# Altium PCB FocDriver.PcbDoc
Units mil, origin at the board's own origin, x right, y up, seen from the top; angles counter-clockwise.
Board outline 6000 x 4000 mil, 2 copper layers (Top Layer, Bottom Layer); 15 components, 14 nets, 92 pads, 0 vias.
Unrouted connection lines stored in the file: 32.
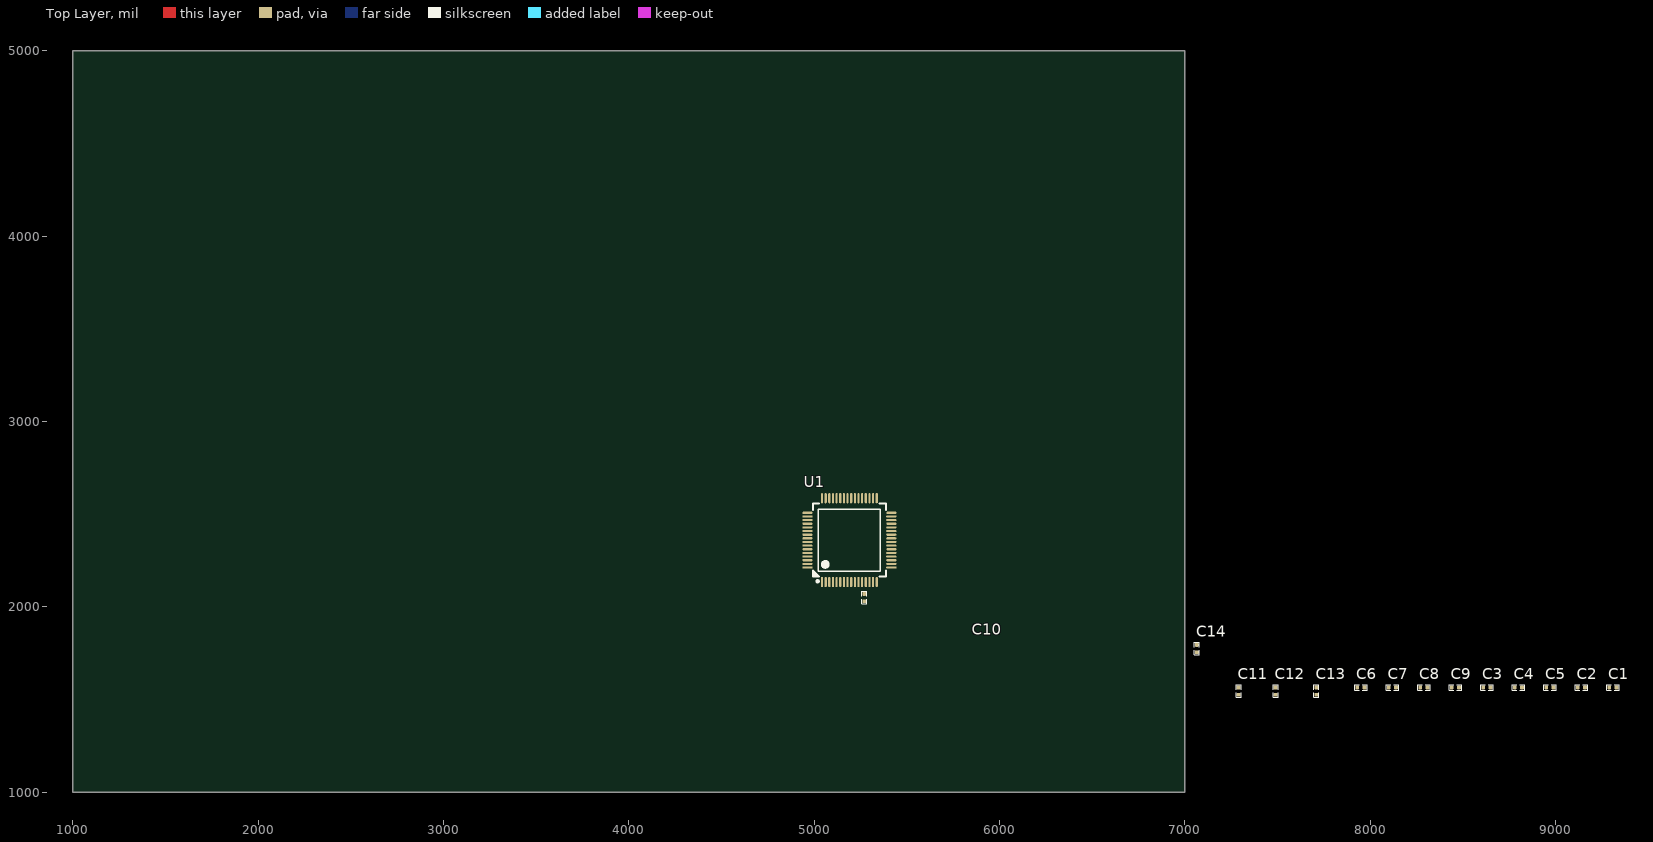
[diagram p0: Top Layer view]
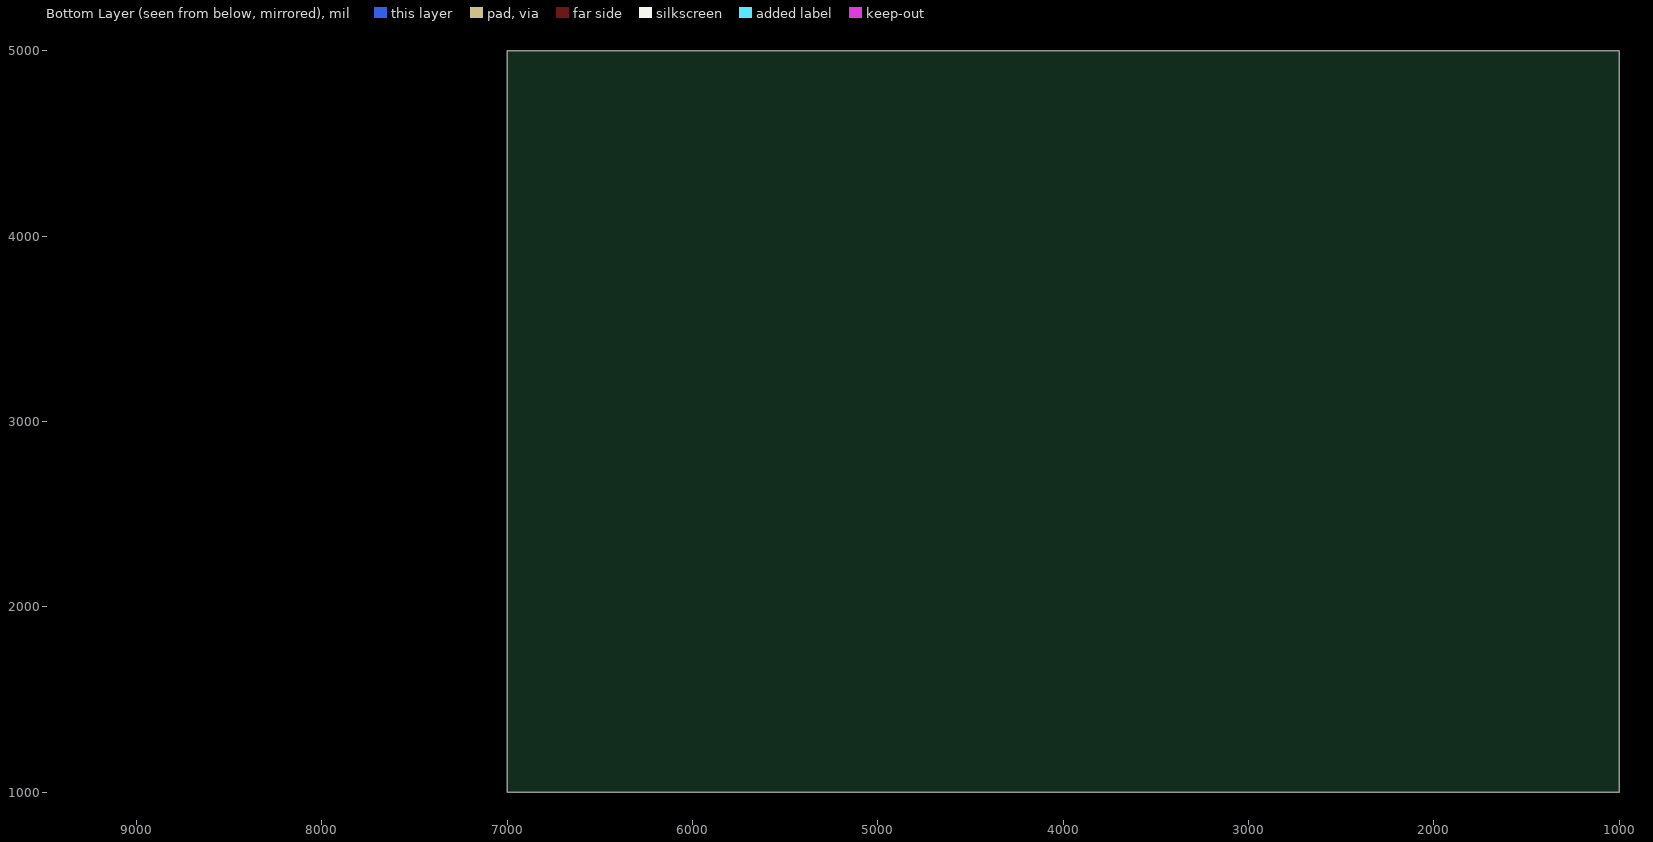
[diagram p1: Bottom Layer view, seen from below]

## Layer stack, top to bottom
Top Solder: solder mask 0.4, Solder Resist, Dk 3.5
Top Layer: signal copper 1.4
Dielectric 1: dielectric 12.6, FR-4, Dk 4.8
Bottom Layer: signal copper 1.4
Bottom Solder: solder mask 0.4, Solder Resist, Dk 3.5

## Board outline
1000,1000 7000,1000 7000,5000 1000,5000

## Design rules (kind name [scope] priority, off if disabled: settings)
Clearance [All] p1: gap=10 ignorepadtopadclearanceinfootprint=FALSE except(0: Arc-Hole Track-Hole SMDPad-Hole THPad-Hole Via-Hole Fill-Hole Poly-Hole Region-Hole Text-Hole)
PolygonConnect [All] p1: connectstyle=Relief reliefconductorwidth=10 reliefentries=4 polygonreliefangle="90 Angle" airgapwidth=10
RoutingVias [All] p1: holewidth=28 width=50 viastyle="Through Hole" minholewidth=28 minwidth=50 maxholewidth=28 maxwidth=50
SolderMaskExpansion [All] p1: expansion=4 istentingtop=FALSE
Width [All] p1: maxlimit=10 minlimit=10 preferedwidth=10
30 further rules are at their usual default settings.

## Classes and differential pairs
component class motor: C14 U3

## Components (designator, comment, footprint, x,y, rotation, side; value= is the part's Value field where it differs from the comment)
C1 "12pF" C0402 9310,1565 r0 top
C2 "12pF" C0402 9140,1565 r0 top
C3 "2.2uF" C0402 8630,1565 r0 top
C4 "2.2uF" C0402 8800,1565 r0 top
C5 "0.1uF" C0402 8970,1565 r0 top
C6 "0.1uF" C0402 7950,1565 r0 top
C7 "0.1uF" C0402 8120,1565 r0 top
C8 "0.1uF" C0402 8290,1565 r0 top
C9 "0.1uF" C0402 8460,1565 r0 top
C10 "0.1uF" C0402 5270,2050 r270 top
C11 "0.1uF" C0402 7290,1545 r90 top
C12 "0.1uF" C0402 7490,1545 r90 top
C13 "0.1uF" C0402 7710,1545 r90 top
C14 "100uF" C0402 7065,1775 r90 top
U1 "STM32F405RGT6" LQFP-64_L10.0-W10.0-P0.50 5190,2360 r0 top

## Footprints (in the part's own frame and the unit in brackets; to place one, negate y for a bottom-side part, rotate by r counter-clockwise, add the part's x,y. Pads: shape width x height; smd on the part's side, far side on the other; paste and mask are expansions set on the pad)
C0402 [mm]
  rrect50% 0.52x0.52 smd mask+0.051: 1(-0.5,0) 2(0.5,0)
  silkscreen extent -0.85,-0.35 0.85,0.35, body extent -0.5,-0.25 0.5,0.25, height 0.5
LQFP-64_L10.0-W10.0-P0.50 [mm]
  oval 0.3x1.4 smd paste+0 mask+0.051: 1(-3.75,-5.75) 2(-3.25,-5.75) 3(-2.75,-5.75) 4(-2.25,-5.75) 5(-1.75,-5.75) 6(-1.25,-5.75) 7(-0.75,-5.75) 8(-0.25,-5.75) 9(0.25,-5.75) 10(0.75,-5.75) 11(1.25,-5.75) 12(1.75,-5.75) 13(2.25,-5.75) 14(2.75,-5.75) 15(3.25,-5.75) 16(3.75,-5.75) 33(3.75,5.75) 34(3.25,5.75) 35(2.75,5.75) 36(2.25,5.75) 37(1.75,5.75) 38(1.25,5.75) 39(0.75,5.75) 40(0.25,5.75) 41(-0.25,5.75) 42(-0.75,5.75) 43(-1.25,5.75) 44(-1.75,5.75) 45(-2.25,5.75) 46(-2.75,5.75) 47(-3.25,5.75) 48(-3.75,5.75)
  oval 1.4x0.3 smd paste+0 mask+0.051: 17(5.75,-3.75) 18(5.75,-3.25) 19(5.75,-2.75) 20(5.75,-2.25) 21(5.75,-1.75) 22(5.75,-1.25) 23(5.75,-0.75) 24(5.75,-0.25) 25(5.75,0.25) 26(5.75,0.75) 27(5.75,1.25) 28(5.75,1.75) 29(5.75,2.25) 30(5.75,2.75) 31(5.75,3.25) 32(5.75,3.75) 49(-5.75,3.75) 50(-5.75,3.25) 51(-5.75,2.75) 52(-5.75,2.25) 53(-5.75,1.75) 54(-5.75,1.25) 55(-5.75,0.75) 56(-5.75,0.25) 57(-5.75,-0.25) 58(-5.75,-0.75) 59(-5.75,-1.25) 60(-5.75,-1.75) 61(-5.75,-2.25) 62(-5.75,-2.75) 63(-5.75,-3.25) 64(-5.75,-3.75)
  silkscreen extent -5,-5.79 5,5, body extent -6,-6 6,6, height 1.45

## Part data
C1 C2 C3 C4 C5 C6 C7 C8 C9 C10 C11 C12 C13: library part CAP, "贴片电容", JLCPCB Part Class="Extended Part", LCSC Part Name="1uF ±10% 10V", Manufacturer=SAMSUNG(三星), Manufacturer Part=CL05A105KP5NNND, Temperature Coefficient=X5R, Tolerance=±10%, Voltage Rated=10V, Add into BOM=yes, Convert to PCB=yes, Datasheet=https://atta.szlcsc.com/upload/public/pdf/source/20181009/C307414_0A02B57115E94FED95F0CB1E32115BFC.pdf, Device=cap-0402, Supplier=LCSC, Supplier Footprint=0402, Supplier Part=C307414, Symbol=CAP-0402
C14: library part CAP+, "贴片型铝电解电容，50V", JLCPCB Part Class="Extended Part", LCSC Part Name="1uF ±10% 10V", Manufacturer=SAMSUNG(三星), Manufacturer Part=CL05A105KP5NNND, Temperature Coefficient=X5R, Tolerance=±10%, Voltage Rated=10V, Add into BOM=yes, Convert to PCB=yes, Datasheet=https://atta.szlcsc.com/upload/public/pdf/source/20181009/C307414_0A02B57115E94FED95F0CB1E32115BFC.pdf, Device=cap-0402, Supplier=LCSC, Supplier Footprint=0402, Supplier Part=C307414, Symbol=CAP-0402
U1: "ST,MCU,CPU内核：ARM Cortex-M4 CPU最大主频：168MHz 程序存储容量：512KB 程序存储器类型：FLASH RAM总容量：192KB"

## Nets (pads, with @x,y where several pads share a name; then routed paths per layer and width w, separated by ;. In a path a pad name is that pad's centre, name@x,y a point inside that pad or via, vN(x,y) a via of type N, cw(c..) or ccw(c..) an arc to the next point about the centre after c; other vN are vias at no path point)
GND: C1.2 C2.2 C3.2 C4.2 C5.1 C6.2 C7.2 C8.2 C9.2 C10.2 C11.2 C12.2 C13.2 U1.12 U1.18 U1.63
NetC1_1: C1.1 U1.5
NetC2_1: C2.1 U1.6
NetC3_1: C3.1 U1.47
NetC4_1: C4.1 U1.31
NetC5_2: C5.2 U1.7
NetJ1_3: 
NetJ1_4: 
NetR1_1: U1.60
NetR5_1: 
SWCLK: U1.49
SWDIO: U1.46
VCC: C10.1 C11.1
VDD3V3: C6.1 C7.1 C8.1 C9.1 C12.1 C13.1 U1.1 U1.13 U1.19 U1.32 U1.48 U1.64
pads on no net: C14.1 C14.2 U1.2 U1.3 U1.4 U1.8 U1.9 U1.10 U1.11 U1.14 U1.15 U1.16 U1.17 U1.20 U1.21 U1.22 U1.23 U1.24 U1.25 U1.26 U1.27 U1.28 U1.29 U1.30 U1.33 U1.34 U1.35 U1.36 U1.37 U1.38 U1.39 U1.40 U1.41 U1.42 U1.43 U1.44 U1.45 U1.50 U1.51 U1.52 U1.53 U1.54 U1.55 U1.56 U1.57 U1.58 U1.59 U1.61 U1.62